# EAGLE board Veroboard for L293D V2(3x2in) (EAGLE 7.7.0)
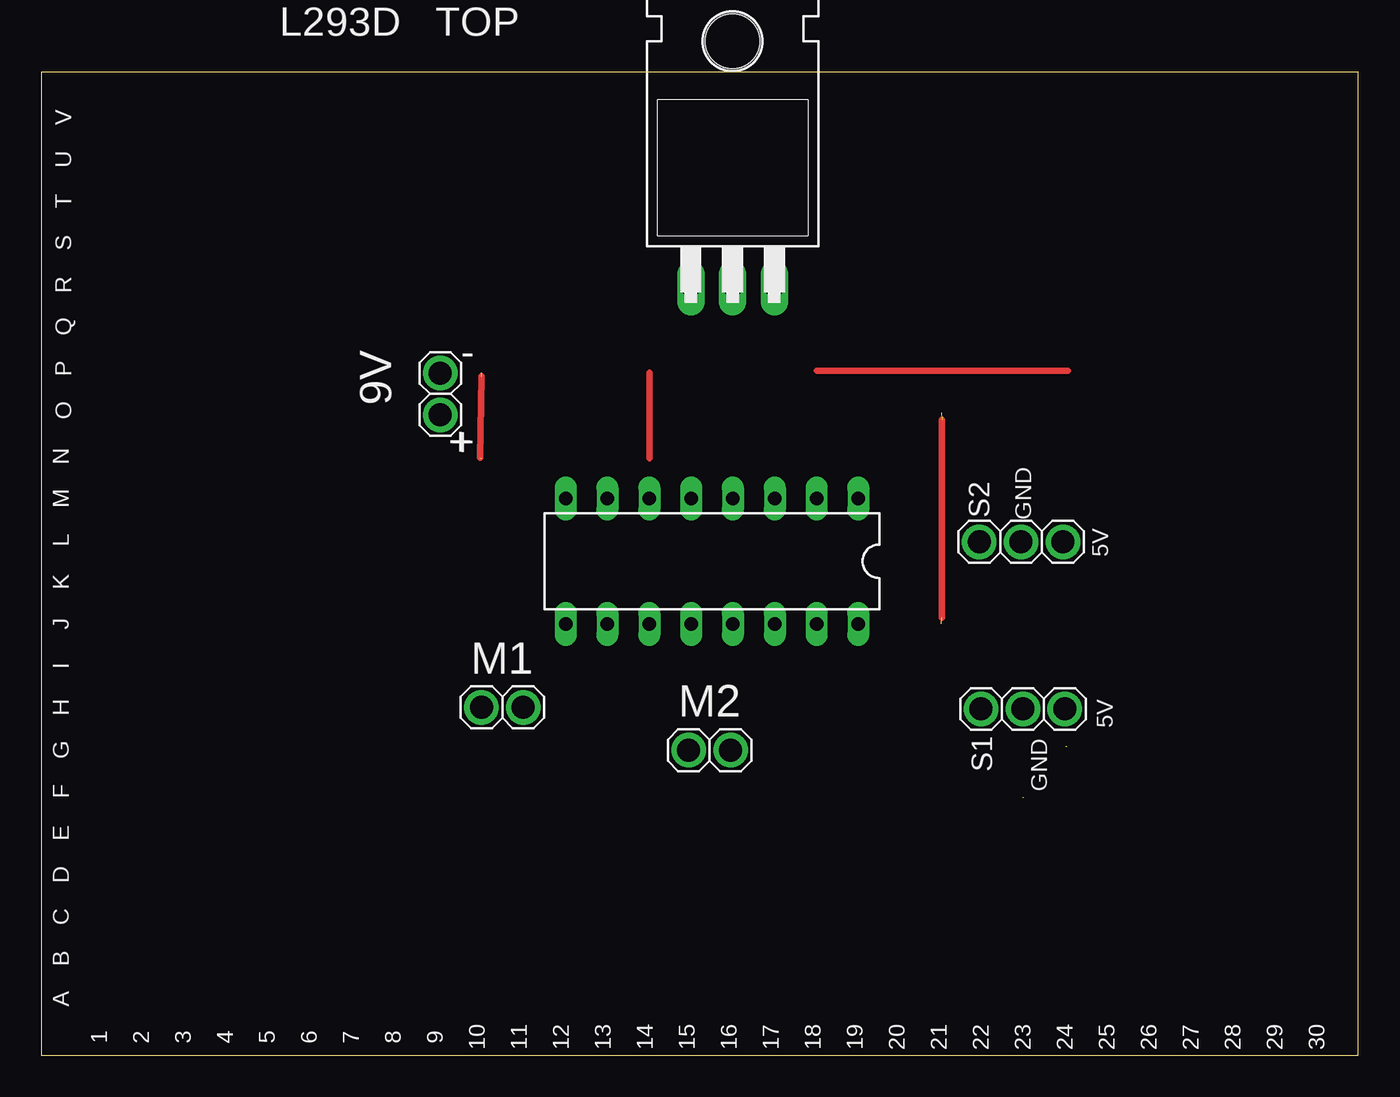
[diagram p0: board, top side]
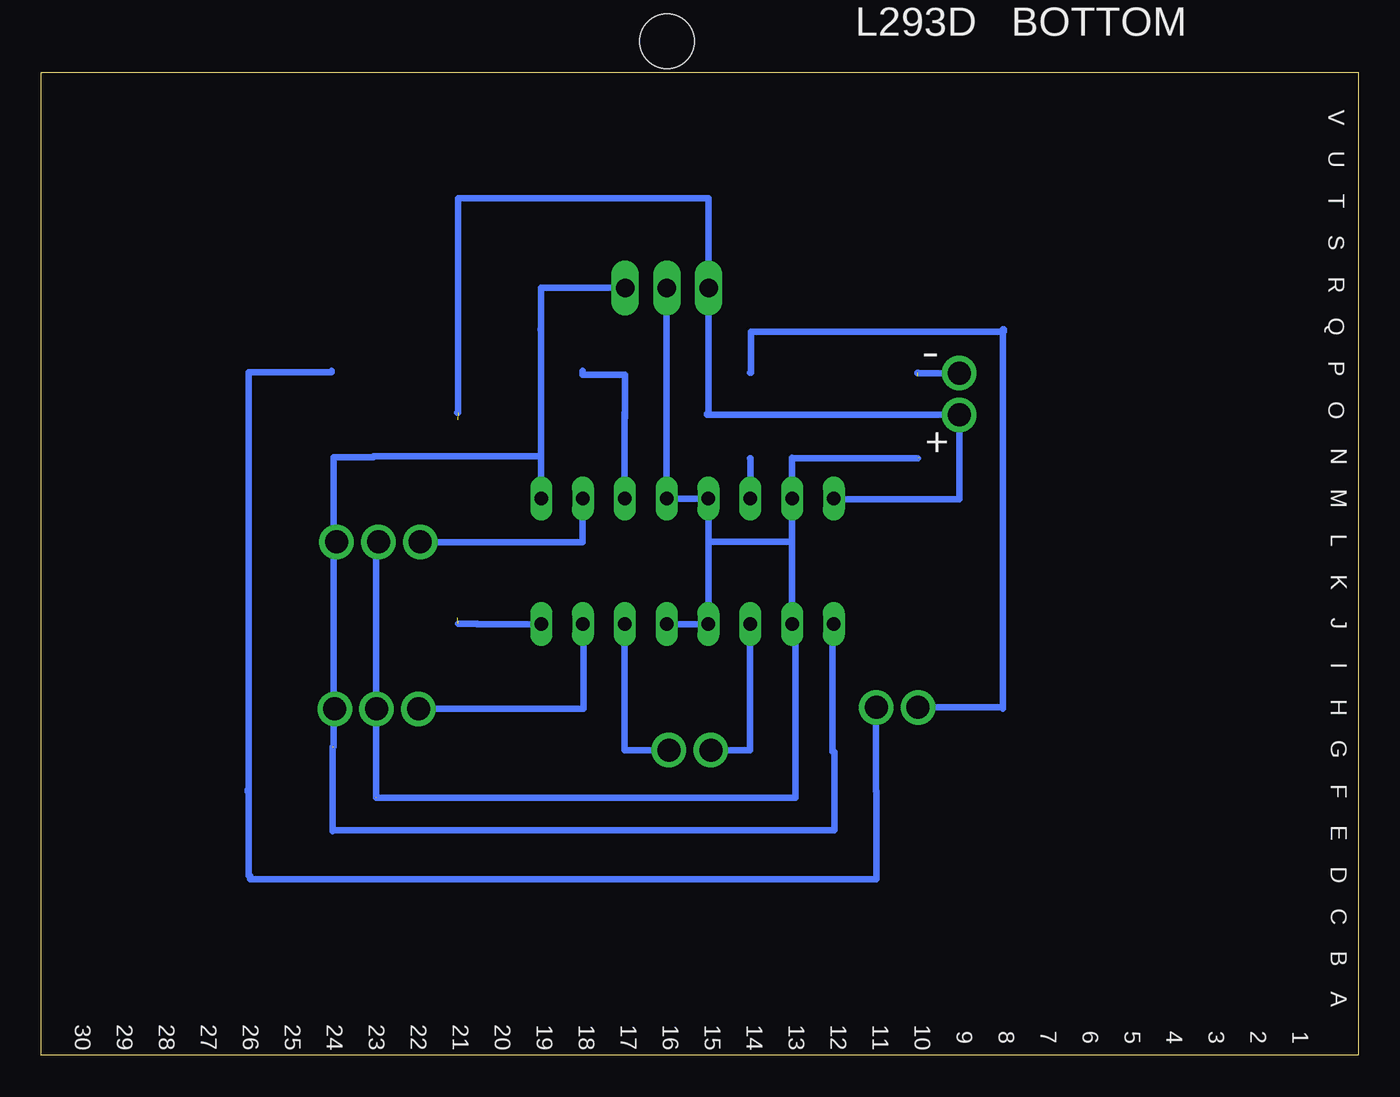
[diagram p1: board, bottom side, seen from below]

Size 80.01 x 59.69 mm. Coordinates in mm from the lower left corner, seen from the top.
Outline: 0,0 80.01,0 80.01,59.69 0,59.69 0,0
Copper layers (1*16): Top 0.035mm / dielectric 1.5mm / Bottom 0.035mm
Design rules "default": minimum track width 10mil, minimum drill 24mil, track to track 8mil, track to pad 8mil, pad to pad 8mil, via to via 8mil, smd to smd 8mil, copper to edge 40mil, drill to drill 8mil, minimum pad ring 10mil, minimum via ring 8mil, stop-mask expansion 4mil, vias tented up to drill 0mil, thermal gap 10mil

## Footprints (pad centres in the part's own frame; a part is rotated, then mirrored left to right if it is on the bottom)
1X02 = drill 1.397: 1 -1.27,0; 2 1.27,0
1X03 = drill 1.397: 1 -2.54,0; 2 0,0; 3 2.54,0
DIL16 = drill 0.813 long: 1 -8.89,-3.81; 2 -6.35,-3.81; 3 -3.81,-3.81; 4 -1.27,-3.81; 5 1.27,-3.81; 6 3.81,-3.81; 7 6.35,-3.81; 8 8.89,-3.81; 9 8.89,3.81; 10 6.35,3.81; 11 3.81,3.81; 12 1.27,3.81; 13 -1.27,3.81; 14 -3.81,3.81; 15 -6.35,3.81; 16 -8.89,3.81
TO220H = drill 1.118 long: 1 -2.54,-10.16; 2 0,-10.16; 3 2.54,-10.16 | hole 3.302: 0,4.826

## Placement (x,y rotation side)
9V  [1X02]  24.25,40.16 90 top
E$1  [1X03]  59.52,31.19 0 top
E$2  [1X03]  59.64,21.03 0 top
IC1  L293D  [DIL16]  40.75,30 180 top
IC2  7805T  [TO220H]  42,56.76 0 top
M1  [1X02]  28.01,21.13 180 top
M2  [1X02]  40.6,18.53 180 top
U$1  [1X30]  40.55,3.25 180 top
U$2  [1X30]  40.55,5.79 180 top
U$3  [1X30]  40.55,8.33 180 top
U$4  [1X30]  40.55,10.87 180 top
U$5  [1X30]  40.55,13.41 180 top
U$6  [1X30]  40.55,15.95 180 top
U$7  [1X30]  40.55,18.49 180 top
U$8  [1X30]  40.55,21.03 180 top
U$9  [1X30]  40.55,23.57 180 top
U$10  [1X30]  40.55,26.11 180 top
U$11  [1X30]  40.55,28.65 180 top
U$12  [1X30]  40.55,31.19 180 top
U$13  [1X30]  40.55,33.73 180 top
U$14  [1X30]  40.55,36.27 180 top
U$15  [1X30]  40.55,38.81 180 top
U$16  [1X30]  40.55,41.35 180 top
U$17  [1X30]  40.55,43.89 180 top
U$18  [1X30]  40.55,46.43 180 top
U$19  [1X30]  40.55,48.97 180 top
U$20  [1X30]  40.55,51.51 180 top
U$21  [1X30]  40.55,54.05 180 top
U$22  [1X30]  40.55,56.59 180 top

## Library data of the parts
9V M1 M2 = pinhead  mod
E$1 E$2 U$1-U$22 = pinhead_1x14_no_frame MOD
IC1 = st-microelectronics; MPN: L293D; OC_FARNELL: 9589619; OC_NEWARK: 56P8249
IC2 = adafruit

## Nets
5V: IC1.1 IC1.9 IC2.3
9V: 9V.1 IC1.8 IC1.16 IC2.1
GND: 9V.2 IC1.4 IC1.5 IC1.7 IC1.10 IC1.12 IC1.13 IC2.2
N$3: IC1.6 M1.2
N$4: IC1.14 M2.1
N$5: IC1.3 M1.1
N$6: IC1.11 M2.2
S1: IC1.15
S2: IC1.2

## Tracks (layer width: path | path; a pad name or v marks a point on that pad's centre or on a via)
5V  (1 unrouted)
  Bottom 0.406: 49.68,44.05 49.68,44.08 49.64,44.08 | 49.64,44.08 49.64,36.39 | 49.64,36.39 IC1.1 | 49.64,36.39 59.82,36.39 59.82,36.32 62.25,36.32 62.25,18.73 | IC2.3 49.64,46.6 49.64,44.08 | IC1.9 31.96,26.19 31.96,18.45 31.81,18.45 31.81,13.68 62.32,13.68 62.32,13.61 62.31,13.61 62.31,18.73
9V  (2 unrouted)
  Top 0.406: 54.72,26.57 54.72,38.59
  Bottom 0.406: 54.74,39.01 54.68,39.01 54.68,52.04 39.46,52.04 39.46,46.66 | IC1.8 31.86,33.77 24.22,33.77 24.22,38.89 9V.1 39.58,38.89 39.58,38.96 39.46,38.96 IC2.1 39.46,46.66 | 39.42,46.66 39.46,46.66 | 54.68,26.21 54.68,26.19 53.53,26.19 IC1.16
GND  (3 unrouted)
  Top 0.406: 26.76,41.25 26.67,36.29
  Bottom 0.406: 9V.2 26.77,41.43 26.77,41.44 26.74,41.44 | 26.74,36.26 34.39,36.26 34.39,36.29 34.4,36.29 IC1.7 | IC2.2 42.02,44.05 IC1.4 IC1.5 39.48,31.17 | 39.48,31.17 IC1.12 IC1.13 | IC1.7 IC1.10 34.19,26.19 34.19,15.65 59.65,15.65 | IC1.7 34.39,31.17 39.48,31.17 | 59.56,31.15 59.67,31.15 59.67,15.68
N$3
  Top 0.406: 36.96,36.26 36.96,41.45
  Bottom 0.406: IC1.6 36.93,36.26 36.96,36.26 | 36.96,41.45 36.89,41.45 36.89,43.94 21.53,43.94 21.53,44.08 21.58,44.08 21.58,21.13 | M1.2 21.58,21.13 | 21.58,21.13 21.58,21.06
N$4
  Bottom 0.406: M2.1 44.56,18.53 IC1.14
N$5
  Top 0.406: 62.37,41.57 47.13,41.57
  Bottom 0.406: M1.1 29.31,21.13 29.31,16.03 29.27,16.03 29.27,10.69 67.33,10.69 67.33,10.91 67.4,10.91 67.4,16.01 | 47.09,41.31 47.13,41.31 47.13,41.57 47.13,41.34 44.54,41.34 44.54,38.71 44.57,38.71 44.57,39.01 44.56,39.01 IC1.3 | 67.47,16.13 67.47,16.01 67.4,16.01 | 67.4,16.01 67.4,41.48 62.37,41.48 62.37,41.57
N$6
  Bottom 0.406: M2.2 36.94,18.53 IC1.11
S1
  Bottom 0.406: IC1.15 47.06,26.19 47.06,21.04 57.23,21.04
S2
  Bottom 0.406: IC1.2 47.14,33.81 47.14,31.17 57.23,31.17 57.07,31.19

## Text on the board
tNames: L293D TOP | V | U | T | S | R | Q | P | - | O | + | N | + | GND | S2 | M | 5V | L | K | J | I | 5V | H | G | S1 | GND | F | E | D | C | B | A | 1 / 2 / 3 / 4 / 5 / 6 / 7 / 8 / 9 / 10 / 11 / 12 / 13 / 14 / 15 / 16 / 17 / 18 / 19 / 20 / 21 / 22 / 23 / 24 / 25 / 26 / 27 / 28 / 29 / 30
bNames: L293D BOTTOM | V | U | T | S | R | Q | P | - | - | O | N | + | M | L | K | J | I | H | G | F | E | D | C | B | A | 1 / 2 / 3 / 4 / 5 / 6 / 7 / 8 / 9 / 10 / 11 / 12 / 13 / 14 / 15 / 16 / 17 / 18 / 19 / 20 / 21 / 22 / 23 / 24 / 25 / 26 / 27 / 28 / 29 / 30